# Altium PCB OnePieceBoard.PcbDoc (part 1 of 2)
Units mil, origin at the board's own origin, x right, y up, seen from the top; angles counter-clockwise.
Board outline 5749.09 x 7970 mil, 2 copper layers (Top Layer, Bottom Layer); 128 components, 61 nets, 384 pads, 43 vias.
Unrouted connection lines stored in the file: 1.
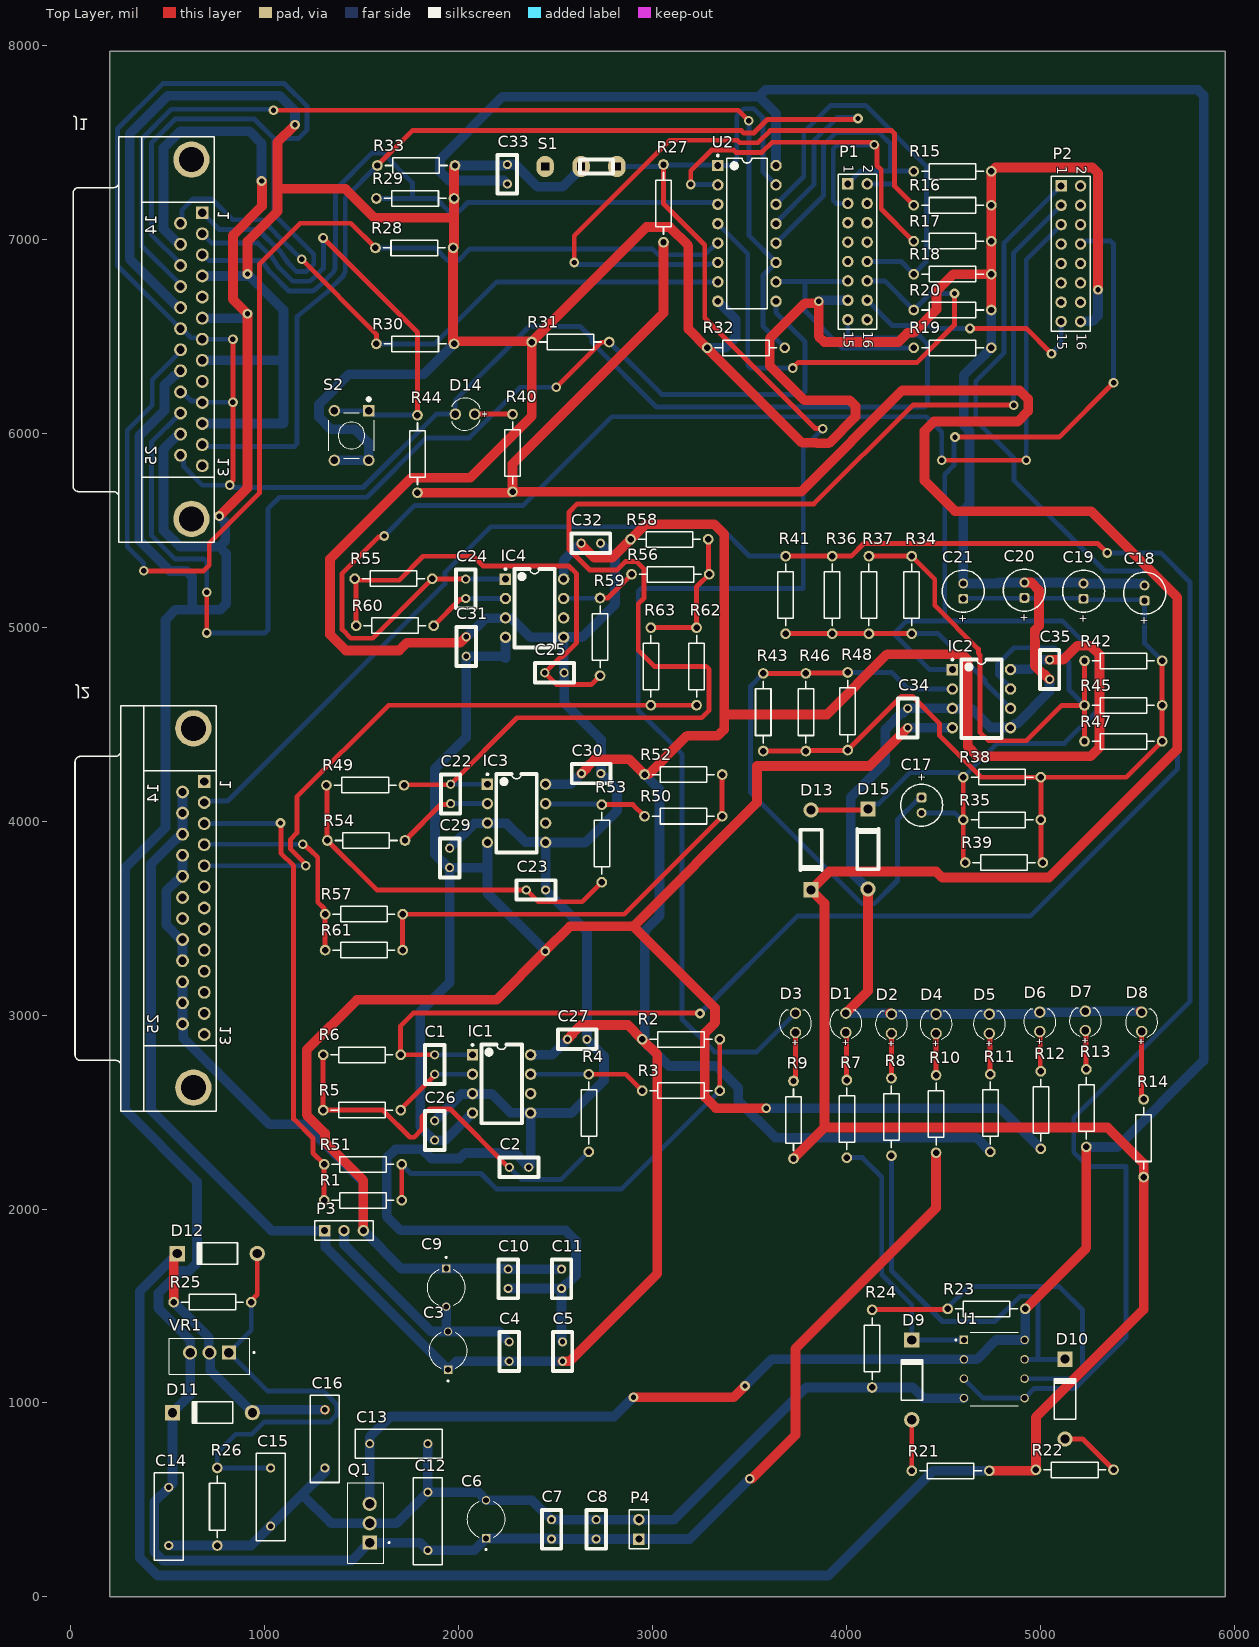
[diagram p0: Top Layer view]
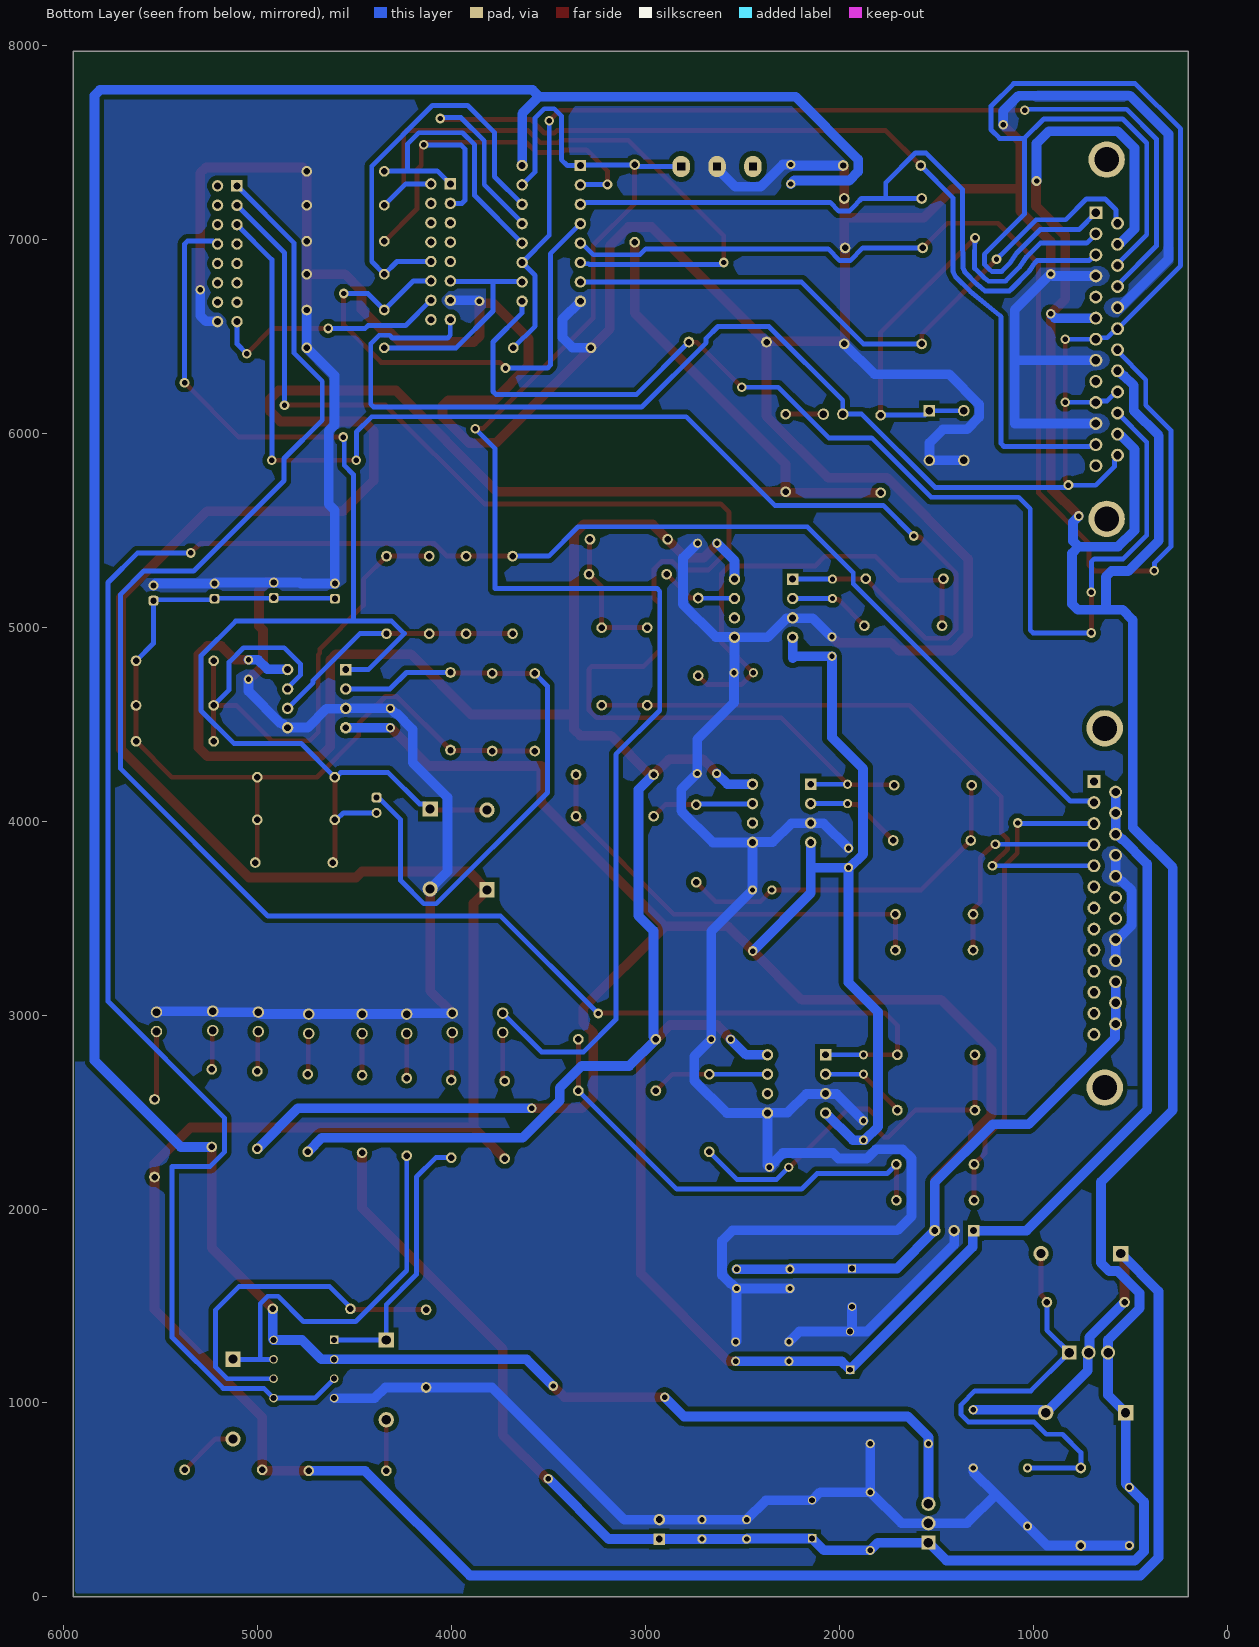
[diagram p1: Bottom Layer view, seen from below]

## Layer stack, top to bottom
Top Solder: solder mask 0.4, Solder Resist, Dk 3.5
Top Layer: signal copper 1.4
Dielectric 1: dielectric 12.6, FR-4, Dk 4.8
Bottom Layer: signal copper 1.4
Bottom Solder: solder mask 0.4, Solder Resist, Dk 3.5

## Board outline
200.91,0 5950,0 5950,7970 200.91,7970

## Design rules (kind name [scope] priority, off if disabled: settings)
AcuteAngle [All] p1: minimum=6.00000000000000E+0001 checktracksonly=FALSE
Clearance [All] p1: gap=25 ignorepadtopadclearanceinfootprint=FALSE
PolygonConnect [All] p1: connectstyle=Direct reliefconductorwidth=10 reliefentries=4 polygonreliefangle="90 Angle" airgapwidth=10
RoomDefinition vdc_signal_adaptation [InComponentClass('vdc_signal_adaptation')] p1: confinementstyle=ConfineIn formatcopy=TRUE lockcomponents=FALSE outline 3459.06,3466.26 5779.06,3466.26 5779.06,5621.26 3459.06,5621.26
RoomDefinition Supplies [InComponentClass('Supplies')] p2: confinementstyle=ConfineIn formatcopy=TRUE lockcomponents=FALSE outline 384.09,110 3085,110 3085,1970 384.09,1970
RoomDefinition Comparator [InComponentClass('Comparator')] p3: confinementstyle=ConfineIn formatcopy=TRUE lockcomponents=FALSE outline 3625,531 5551.87,531 5551.87,1635 3625,1635
RoomDefinition current_signal_adaptation [InComponentClass('current_signal_adaptation')] p4: confinementstyle=ConfineIn formatcopy=TRUE lockcomponents=FALSE outline 1225,1980 3385,1980 3385,3145 1225,3145
RoomDefinition current_signal_adaptation_2 [InComponentClass('current_signal_adaptation_2')] p5: confinementstyle=ConfineIn formatcopy=TRUE lockcomponents=FALSE outline 1205,3260 3395,3260 3395,4435 1205,4435
RoomDefinition connectors_headers_LEDs [InComponentClass('connectors_headers_LEDs')] p6: confinementstyle=ConfineIn formatcopy=TRUE lockcomponents=FALSE outline 3550,2075 5665,2075 5665,3200 3550,3200
RoomDefinition current_signal_adaptation_3 [InComponentClass('current_signal_adaptation_3')] p7: confinementstyle=ConfineIn formatcopy=TRUE lockcomponents=FALSE outline 1285,4540 3435,4540 3435,5620 1285,5620
RoomDefinition Header [InComponentClass('Header')] p8: confinementstyle=ConfineIn formatcopy=TRUE lockcomponents=FALSE outline 5475,7400 3810,7400 3810,6320 5475,6320
RoomDefinition pwm_buffers_fault_sig [InComponentClass('pwm_buffers_fault_sig')] p9: confinementstyle=ConfineIn formatcopy=TRUE lockcomponents=FALSE outline 1271.42,5627.95 2425,5627.95 2425,6340 1271.42,6340
RoomDefinition "PWM Drivers" [InComponentClass('PWM Drivers')] p10: confinementstyle=ConfineIn formatcopy=TRUE lockcomponents=FALSE outline 1499.77,6350 3809.77,6350 3809.77,7565 1499.77,7565
RoomDefinition "Connector 1" [InComponentClass('Connector 1')] p11: confinementstyle=ConfineIn formatcopy=TRUE lockcomponents=FALSE outline 0,5380 835,5380 835,7595 0,7595
RoomDefinition "Connector 2" [InComponentClass('Connector 2')] p12: confinementstyle=ConfineIn formatcopy=TRUE lockcomponents=FALSE outline 0,2485 835,2485 835,4700 0,4700
RoutingVias [All] p1: holewidth=28 width=50 viastyle="Through Hole" minholewidth=28 minwidth=50 maxholewidth=28 maxwidth=50
SolderMaskExpansion [All] p1: expansion=4 istentingtop=FALSE
SupplyNets "Schematic Supply Nets_5" [InNet('VDD_15')] p1: voltage=0.000
SupplyNets "Schematic Supply Nets_4" [InNet('+5V')] p2: voltage=0.000
SupplyNets "Schematic Supply Nets_3" [InNet('GND')] p3: voltage=0.000
SupplyNets "Schematic Supply Nets_2" [InNet('3V3')] p4: voltage=0.000
SupplyNets "Schematic Supply Nets_1" [InNet('VEE_-15')] p5: voltage=0.000
SupplyNets "Schematic Supply Nets" [InNet('VIN_12')] p6: voltage=0.000
Width GND [InNet('GND')] p1: maxlimit=50 minlimit=50 preferedwidth=50 minimp=50.000000 maximp=50.000000 favimp=50.000000
Width GND_CTL [InNet('GND_CTL')] p2: maxlimit=50 minlimit=50 preferedwidth=50 minimp=50.000000 maximp=50.000000 favimp=50.000000
Width GND_SENS [InNet('GND_SENS')] p3: maxlimit=50 minlimit=50 preferedwidth=50 minimp=50.000000 maximp=50.000000 favimp=50.000000
Width Power-3V3 [InNet('3V3')] p4: maxlimit=50 minlimit=50 preferedwidth=50 minimp=50.000000 maximp=50.000000 favimp=50.000000
Width Power-5V [InNet('+5V')] p5: maxlimit=50 minlimit=50 preferedwidth=50 minimp=50.000000 maximp=50.000000 favimp=50.000000
Width Power-VIN [InNet('VIN_12')] p6: maxlimit=50 minlimit=50 preferedwidth=50 minimp=50.000000 maximp=50.000000 favimp=50.000000
Width Power-VEE [InNet('VEE_-15')] p7: maxlimit=50 minlimit=50 preferedwidth=50 minimp=50.000000 maximp=50.000000 favimp=50.000000
Width Power-VDD [InNet('VDD_15')] p8: maxlimit=50 minlimit=50 preferedwidth=50 minimp=50.000000 maximp=50.000000 favimp=50.000000
Width Signals [All] p9: maxlimit=25 minlimit=25 preferedwidth=25 minimp=50.000000 maximp=50.000000 favimp=50.000000
30 further rules are at their usual default settings.

## Classes and differential pairs
component class vdc_signal_adaptation: C17 C18 C19 C20 C21 C34 C35 D13 D15 IC2 R34 R35 R36 R37 R38 R39 R41 R42 R43 R45 R46 R47 R48
component class Supplies: C3 C4 C5 C6 C7 C8 C9 C10 C11 C12 C13 C14 C15 C16 D11 D12 P3 P4 Q1 R25 R26 VR1
component class "PWM Drivers": C33 R27 R28 R29 R30 R31 R32 R33 S1 U2
component class pwm_buffers_fault_sig: D14 R40 R44 S2
component class Header: P1 P2 R15 R16 R17 R18 R19 R20
component class current_signal_adaptation: C1 C2 C26 C27 IC1 R1 R2 R3 R4 R5 R6 R51
component class current_signal_adaptation_3: C24 C25 C31 C32 IC4 R55 R56 R58 R59 R60 R62 R63
component class current_signal_adaptation_2: C22 C23 C29 C30 IC3 R49 R50 R52 R53 R54 R57 R61
component class connectors_headers_LEDs: D1 D2 D3 D4 D5 D6 D7 D8 R7 R8 R9 R10 R11 R12 R13 R14
component class "Connector 2": J2
component class "Connector 1": J1
component class Comparator: D9 D10 R21 R22 R23 R24 U1

## Components (designator, comment, footprint, x,y, rotation, side; value= is the part's Value field where it differs from the comment)
C1 "Cap No Pol" RAD-0.1 1875,2745 r90 top value=10nF
C2 "Cap No Pol" RAD-0.1 2310,2215 r0 top value=47nF
C3 "ECA2AM100B" CAPPRD500W50D500H1100 1944.09,1270 r90 top
C4 "Cap No Pol" RAD-0.1 2259.09,1265 r90 top value=1uF
C5 "Cap No Pol" RAD-0.1 2534.09,1265 r90 top value=1uF
C6 "ECA2AM100B" CAPPRD500W50D500H1100 2140,400 r90 top
C7 "Cap No Pol" RAD-0.1 2477.52,348.42 r90 top value=1uF
C8 "Cap No Pol" RAD-0.1 2707.52,348.42 r90 top value=1uF
C9 "ECA2AM100B" CAPPRD500W50D500H1100 1934.09,1595 r270 top
C10 "Cap No Pol" RAD-0.1 2254.09,1640 r270 top value=1uF
C11 "Cap No Pol" RAD-0.1 2529.09,1640 r270 top value=1uF
C12 "Cap" RAD-0.3 1840,390 r90 top value=0.22uF
C13 "Cap" RAD-0.3 1690,790 r0 top value=0.1uF
C14 "Cap" RAD-0.3 504.09,415 r270 top value=0.1uF
C15 "Cap" RAD-0.3 1029.09,515 r270 top value=1uF
C16 "Cap" RAD-0.3 1309.09,815 r270 top value=1uF
C17 "860020772005" WCAP-ATG5_D5H11 -45614.68,54081.89 r90 top
C18 "860020772005" WCAP-ATG5_D5H11 55535.32,-44824.37 r270 top
C19 "860020772005" WCAP-ATG5_D5H11 55220.32,-44814.37 r270 top
C20 "860020772005" WCAP-ATG5_D5H11 54915.32,-44809.37 r270 top
C21 "860020772005" WCAP-ATG5_D5H11 54600.32,-44814.37 r270 top
C22 "Cap No Pol" RAD-0.1 1957.03,4140 r90 top value=10nF
C23 "Cap No Pol" RAD-0.1 2397.03,3645 r0 top value=47nF
C24 "Cap No Pol" RAD-0.1 2035,5197.5 r90 top value=10nF
C25 "Cap No Pol" RAD-0.1 2492.5,4765 r0 top value=47nF
C26 "Cap No Pol" RAD-0.1 1875,2405 r90 top value=1uF
C27 "Cap No Pol" RAD-0.1 2610,2875 r0 top value=1uF
C29 "Cap No Pol" RAD-0.1 1952.03,3810 r90 top value=1uF
C30 "Cap No Pol" RAD-0.1 2682.03,4245 r0 top value=1uF
C31 "Cap No Pol" RAD-0.1 2037.5,4900 r90 top value=1uF
C32 "Cap No Pol" RAD-0.1 2680,5432.5 r0 top value=1uF
C33 "Cap No Pol" RAD-0.1 2249.77,7335 r90 top value=1uF
C34 "Cap No Pol" RAD-0.1 4314.06,4531.26 r90 top value=1uF
C35 "Cap No Pol" RAD-0.1 5045.32,4781.26 r270 top value=1uF
D1 "Bright Green, 2.1V, 40°" WL-TMRC_D3.95H5.3 3995,2960 r90 top
D2 "Bright Green, 2.1V, 40°" WL-TMRC_D3.95H5.3 4230,2955 r90 top
D3 "Super Red, 2V, 40°" WL-TMRC_D3.95H5.3 3735,2960 r90 top
D4 "Super Red, 2V, 40°" WL-TMRC_D3.95H5.3 4460,2955 r90 top
D5 "Super Red, 2V, 40°" WL-TMRC_D3.95H5.3 4735,2955 r90 top
D6 "Super Red, 2V, 40°" WL-TMRC_D3.95H5.3 4995,2965 r90 top
D7 "Super Red, 2V, 40°" WL-TMRC_D3.95H5.3 5230,2970 r90 top
D8 "Super Red, 2V, 40°" WL-TMRC_D3.95H5.3 5520,2965 r90 top
D9 "Diode 1N4001" DO-41 4335,1119.09 r90 top
D10 "Diode 1N4001" DO-41 5125,1020 r90 top
D11 "Diode 1N4001" DO-41 729.09,950 r180 top
D12 "Diode 1N4001" DO-41 754.09,1770 r180 top
D13 "Diode BAT54" DO-204AL 3815.32,3851.26 r270 top
D14 "Super Red, 2V, 40°" WL-TMRC_D3.95H5.3 2031.42,6097.95 r180 top
D15 "Diode BAT54" DO-204AL 4109.06,3856.26 r90 top
IC1 "OPAMP" DIP-8 2220,2645 r0 top
IC2 "OPAMP" DIP-8 4694.06,4631.26 r0 top
IC3 "OPAMP" DIP-8 2297.03,4040 r0 top
IC4 "OPAMP" DIP-8 2390,5097.5 r0 top
J1 "D Connector 25" DSUB1.385-2H25A 246.89,6484.35 r270 top
J2 "D Connector 25" DSUB1.385-2H25A 256.89,3552.15 r270 top
P1 "Header 8X2" HDR2X8 4005,7285 r270 top
P2 "Header 8X2" HDR2X8 5105,7275 r270 top
P3 "Header 3" HDR1X3 1307.52,1888.43 r0 top
P4 "Header 2" HDR1X2 2927.52,298.42 r90 top
Q1 "LM7805CT/NOPB" TO254P1054X470X1955-3#1 1540,380 r90 top
R1 "Res1" AXIAL-0.4 1505,2045 r0 top value=100k
R2 "Res1" AXIAL-0.4 3145,2875 r0 top value=100k
R3 "Res1" AXIAL-0.4 3145,2610 r180 top value=10k
R4 "Res1" AXIAL-0.4 2670,2495 r270 top value=10k
R5 "Res1" AXIAL-0.4 1500,2510 r0 top value=6.2k
R6 "Res1" AXIAL-0.4 1500,2795 r0 top value=10k
R7 "Res1" AXIAL-0.4 4000,2465 r270 top value=10k
R8 "Res1" AXIAL-0.4 4230,2475 r270 top value=10k
R9 "Res1" AXIAL-0.4 3725,2460 r270 top value=10k
R10 "Res1" AXIAL-0.4 4460,2490 r270 top value=10k
R11 "Res1" AXIAL-0.4 4740,2495 r270 top value=10k
R12 "Res1" AXIAL-0.4 5000,2510 r270 top value=10k
R13 "Res1" AXIAL-0.4 5235,2520 r270 top value=10k
R14 "Res1" AXIAL-0.4 5530,2365 r270 top value=10k
R15 "Res1" AXIAL-0.4 4545,7350 r180 top value=1k
R16 "Res1" AXIAL-0.4 4545,7175 r180 top value=1k
R17 "Res1" AXIAL-0.4 4545,6990 r180 top value=1k
R18 "Res1" AXIAL-0.4 4545,6820 r180 top value=1k
R19 "Res1" AXIAL-0.4 4545,6440 r180 top value=1k
R20 "Res1" AXIAL-0.4 4545,6635 r180 top value=1k
R21 "Res1" AXIAL-0.4 4535,650 r0 top value=10k
R22 "Res1" AXIAL-0.4 5175,655 r180 top value=10k
R23 "Res1" AXIAL-0.4 4720,1485 r0 top value=10k
R24 "Res1" AXIAL-0.4 4130,1280 r90 top value=510
R25 "Res1" AXIAL-0.4 729.09,1520 r180 top value=390
R26 "Res1" AXIAL-0.4 754.09,465 r90 top value=620
R27 "Res1" AXIAL-0.4 3054.77,7185 r270 top value=10k
R28 "Res1" AXIAL-0.4 1769.77,6955 r180 top value=1k
R29 "Res1" AXIAL-0.4 1774.77,7210 r180 top value=1k
R30 "Res1" AXIAL-0.4 1774.77,6460 r180 top value=1k
R31 "Res1" AXIAL-0.4 2574.77,6470 r0 top value=1k
R32 "Res1" AXIAL-0.4 3479.77,6440 r0 top value=1k
R33 "Res1" AXIAL-0.4 1779.77,7380 r180 top value=1k
R34 "Res1" AXIAL-0.4 4334.06,5166.26 r90 top value=20k
R35 "Res1" AXIAL-0.4 4800.32,4006.26 r180 top value=12k
R36 "" AXIAL-0.4 3924.06,5166.26 r270 top value=100k
R37 "Res1" AXIAL-0.4 4114.06,5166.26 r90 top value=20k
R38 "Res1" AXIAL-0.4 4800.32,4226.26 r180 top value=13k
R39 "Res1" AXIAL-0.4 4810.32,3786.26 r180 top value=13k
R40 "Res1" AXIAL-0.4 2276.42,5897.95 r270 top value=10k
R41 "Res1" AXIAL-0.4 3684.06,5166.26 r270 top value=100k
R42 "Res1" AXIAL-0.4 5425.32,4826.26 r0 top value=12k
R43 "Res1" AXIAL-0.4 3569.06,4561.26 r90 top value=7.15k
R44 "Res1" AXIAL-0.4 1786.42,5892.95 r270 top value=10k
R45 "Res1" AXIAL-0.4 5425.32,4596.26 r0 top value=13k
R46 "Res1" AXIAL-0.4 3789.06,4561.26 r90 top value=7.15k
R47 "Res1" AXIAL-0.4 5425.32,4411.26 r0 top value=13k
R48 "Res1" AXIAL-0.4 4004.06,4566.26 r90 top value=7.15k
R49 "Res1" AXIAL-0.4 1517.03,4185 r0 top value=10k
R50 "Res1" AXIAL-0.4 3157.03,4025 r180 top value=10k
R51 "Res1" AXIAL-0.4 1505,2230 r0 top value=100k
R52 "Res1" AXIAL-0.4 3157.03,4240 r0 top value=100k
R53 "Res1" AXIAL-0.4 2737.03,3885 r270 top value=10k
R54 "Res1" AXIAL-0.4 1522.03,3900 r0 top value=6.2k
R55 "Res1" AXIAL-0.4 1662.5,5250 r0 top value=10k
R56 "Res1" AXIAL-0.4 3090,5272.5 r180 top value=10k
R57 "Res1" AXIAL-0.4 1510,3520 r0 top value=100k
R58 "Res1" AXIAL-0.4 3085,5452.5 r0 top value=100k
R59 "Res1" AXIAL-0.4 2727.5,4950 r270 top value=10k
R60 "Res1" AXIAL-0.4 1670,5007.5 r0 top value=6.2k
R61 "Res1" AXIAL-0.4 1510,3335 r0 top value=100k
R62 "Res1" AXIAL-0.4 3225,4797.5 r90 top value=100k
R63 "Res1" AXIAL-0.4 2990,4797.5 r90 top value=100k
S1 "SW-SPDT" MHDR1X3 2759.77,7375 r180 top
S2 "FSM8JH" SW_FSM8JH 1446.42,5987.95 r270 top
U1 "LM393N" DIP794W45P254L959H508Q8 4760,1175 r0 top
U2 "CD74HC367E" N0016A 3484.77,7030 r0 top
VR1 "LM317T/NOPB" TO254P1054X470X1955-3#2 714.09,1260 r180 top

## Footprints (in the part's own frame and the unit in brackets; to place one, negate y for a bottom-side part, rotate by r counter-clockwise, add the part's x,y. Pads: shape width x height; smd on the part's side, far side on the other; paste and mask are expansions set on the pad)
AXIAL-0.4 [mm] "Axial Device, Thru-Hole; 2 Leads; 0.4 in Pin Spacing"
  round 1.4 hole 0.85: 1(-5.08,0) 2(5.08,0)
  silkscreen extent -4.06,-1.02 4.06,1.02
CAPPRD500W50D500H1100 [mm]
  round 1.1 hole 0.75: N(2.5,0)
  rect 1.1x1.1 hole 0.75: P(-2.5,0)
  silkscreen extent -4.06,-2.5 2.32,2.5, body extent -2.75,-2.5 2.75,2.5, height 11
DIP794W45P254L959H508Q8 [mm]
  rect 1.13x1.13 hole 0.78: 1(-3.97,3.81)
  round 1.13 hole 0.78: 2(-3.97,1.27) 3(-3.97,-1.27) 4(-3.97,-3.81) 5(3.97,-3.81) 6(3.97,-1.27) 7(3.97,1.27) 8(3.97,3.81)
  silkscreen extent -5.13,-4.8 3.17,4.8
DIP-8 [mm]
  rect 1.5x1.5 hole 0.9: 1(-3.81,3.81)
  round 1.5 hole 0.9: 2(-3.81,1.27) 3(-3.81,-1.27) 4(-3.81,-3.81) 5(3.81,-3.81) 6(3.81,-1.27) 7(3.81,1.27) 8(3.81,3.81)
  silkscreen extent -3.93,-5.15 2.65,5.23, body extent -3.6,-5.15 3.6,5.15, height 5.08
DO-41 [mm] "Diode, Axial; Body 5.2 x 2.7 mm (LxDia. max), Lead Dia. 0.86 mm (max)"
  round 2 hole 1.2: 1(-5.23,0)
  rect 2x2 hole 1.2: 2(5.23,0)
  silkscreen extent -2.65,-1.42 2.75,1.4
DO-204AL [mm]
  round 2 hole 1.2: 1(-5.23,0)
  rect 2x2 hole 1.2: 2(5.23,0)
  silkscreen extent -2.65,-1.4 2.75,1.4
DSUB1.385-2H25A [mm] "Connector; D Subminiature; 25 Position; Right Angle; Pitch 1.385 mm"
  rect 1.69x1.69 hole 1.09: 1(-16.566,10.92)
  round 1.69 hole 1.09: 2(-13.805,10.92) 3(-11.044,10.92) 4(-8.283,10.92) 5(-5.522,10.92) 6(-2.761,10.92) 7(0,10.92) 8(2.761,10.92) 9(5.522,10.92) 10(8.283,10.92) 11(11.044,10.92) 12(13.805,10.92) 13(16.566,10.92) 14(-15.185,8.08) 15(-12.425,8.08) 16(-9.663,8.08) 17(-6.903,8.08) 18(-4.142,8.08) 19(-1.38,8.08) 20(1.38,8.08) 21(4.142,8.08) 22(6.903,8.08) 23(9.663,8.08) 24(12.425,8.08) 25(15.185,8.08)
  round 4.76 hole 3.26: 26(-23.526,9.5) 27(23.526,9.5)
  silkscreen extent -26.5,-6 26.6,12.5
HDR1X2 [mm] "Connector; Header; 2 Position"
  rect 1.5x1.5 hole 0.9: 1(0,0)
  round 1.5 hole 0.9: 2(2.54,0)
  silkscreen extent -1.27,-1.27 3.81,1.27
HDR1X3 [mm] "Connector; Header; 3 Position"
  rect 1.5x1.5 hole 0.9: 1(0,0)
  round 1.5 hole 0.9: 2(2.54,0) 3(5.08,0)
  silkscreen extent -1.27,-1.27 6.35,1.27
HDR2X8 [mm] "Connector; Header; 8x2 Position"
  rect 1.5x1.5 hole 0.9: 1(0,0)
  round 1.5 hole 0.9: 2(0,2.54) 3(2.54,0) 4(2.54,2.54) 5(5.08,0) 6(5.08,2.54) 7(7.62,0) 8(7.62,2.54) 9(10.16,0) 10(10.16,2.54) 11(12.7,0) 12(12.7,2.54) 13(15.24,0) 14(15.24,2.54) 15(17.78,0) 16(17.78,2.54)
  silkscreen extent -1.27,-1.27 19.05,3.81
MHDR1X3 [mil]
  oval 90x110 hole 40 square: 1(-55,0) 2(130,0) 3(315,0)
  silkscreen extent -35,-35 135,35
N0016A [mm] "DIP, 16-Leads, Body 19.7x6.6mm, Pitch 2.54mm"
  rect 1.5x1.5 hole 0.9: 1(-3.81,8.89)
  round 1.5 hole 0.9: 2(-3.81,6.35) 3(-3.81,3.81) 4(-3.81,1.27) 5(-3.81,-1.27) 6(-3.81,-3.81) 7(-3.81,-6.35) 8(-3.81,-8.89) 9(3.81,-8.89) 10(3.81,-6.35) 11(3.81,-3.81) 12(3.81,-1.27) 13(3.81,1.27) 14(3.81,3.81) 15(3.81,6.35) 16(3.81,8.89)
  silkscreen extent -3.93,-9.85 2.65,10.31, body extent -3.95,-9.85 3.95,9.85, height 5.08
RAD-0.1 [mm]
  round 1.2 hole 0.7: 1(-1.27,0) 2(1.27,0)
  silkscreen extent -2.54,-1.27 2.54,1.27
RAD-0.3 [mm] "Radial Cap, Thru-Hole; 2 Leads; 0.3 in Pin Spacing"
  round 1.2 hole 0.7: 1(-3.81,0) 2(3.81,0)
  silkscreen extent -5.71,-1.91 5.71,1.9
SW_FSM8JH [mm]
  rect 1.498x1.498 / inner round 1.498 / far side rect 1.498x1.498 hole 0.99: 1(-3.25,2.25)
  round 1.498 hole 0.99: 2(-3.25,-2.25) 3(3.25,2.25) 4(3.25,-2.25)
  silkscreen extent -4.95,-3 3,3, body extent -3,-3.95 3,3.95, height 9.5
TO254P1054X470X1955-3#1 [mm]
  rect 1.86x1.86 hole 1.24: 1(-2.54,0)
  round 1.86 hole 1.24: 2(0,0) 3(2.54,0)
  silkscreen extent -5.27,-2.64 5.27,2.86
TO254P1054X470X1955-3#2 [mm]
  rect 1.86x1.86 / inner round 1.86 / far side rect 1.86x1.86 hole 1.24: 1(-2.54,0)
  round 1.86 hole 1.24: 2(0,0) 3(2.54,0)
  silkscreen extent -5.94,-1.84 5.27,2.86, body extent -5.08,-1.49 5.08,2.71, height 22.86
WCAP-ATG5_D5H11 [mm] "Aluminum Electrolytic Capacitors, 5x11mm"
  rrect50% 1.3x1.3 hole 0.8: 1(-1269,-1270)
  round 1.3 hole 0.8: 2(-1271,-1270)
  silkscreen extent -1272.75,-1272.75 -1267.25,-1267.25, body extent -1272.49,-1272.5 -1267.5,-1267.5, height 11.31
WL-TMRC_D3.95H5.3 [mm] "THT Mono-color Round Color LED, 2-leads"
  round 1.5 hole 1: 1(-1.27,0) 2(1.27,0)
  silkscreen extent -2,-2.1 1.69,2.1, body extent -1.99,-1.97 1.63,1.97, height 5.35

## Part data
C1 C2 C4 C5 C7 C8 C10 C11 C22 C23 C24 C25 C26 C27 C29 C30 C31 C32 C33 C34 C35: "Polarized Capacitor (Radial)", LatestRevisionDate=17-Jul-2002, LatestRevisionNote="Re-released for DXP Platform.", PackageDescription="Polarized Capacitor (Radial); 2 Leads", PackageReference=RB7.6-15, Published=8-Jun-2000, Publisher="Altium Limited"
C3 C6 C9: "10ÂµF 100V Aluminum Electrolytic Capacitors Radial, Can 2000 Hrs @ 85Â°C", Package="RADIAL-2 Panasonic", Check_prices=https://www.snapeda.com/parts/ECA2AM100B/Panasonic/view-part/?ref=eda, Digi-Key_Part_Number=P19556TB-ND, MF=Panasonic, MP=ECA2AM100B, SnapEDA_Link=https://www.snapeda.com/parts/ECA2AM100B/Panasonic/view-part/?ref=snap
C12 C13 C14 C15 C16: "Capacitor", LatestRevisionDate=17-Jul-2002, LatestRevisionNote="Re-released for DXP Platform.", PackageDescription="Radial Cap, Thru-Hole; 2 Leads; 0.3 in Pin Spacing", PackageReference=RAD-0.3, Published=8-Jun-2000, Publisher="Altium Limited"
C17 C18 C19 C20 C21: library part CMP-03913-53914248-1, "860020772005 Cap Aluminum Lytic 1uF 63V 20% (5 X 11mm) Radial 2mm 13mA 2000h 105C", Capacitance=1µF, Case/Package=Radial, Leakage Current=3µA, Max Operating Temperature=105°C, Min Operating Temperature=-40°C, Ripple Current=13mA, Tolerance=20%, Voltage Rating=63V, Diameter=5mm, Height=11mm, Height - Seated (Max)=12.4968mm, Lead Pitch=2.0066mm, Length=11mm, Life (Hours)=2000hours, Material=Aluminium, Mount="Through Hole", NexarPartId=53914248, Packaging="Tape & Box (TB)", Pitch=2mm, Polarity=Polar, REACH SVHC=Unknown, RoHS=Compliant, Voltage Rating (DC)=63V
D1 D2: library part 151031VS04000, "WL-TMRC Mono-color Round Color, THT, D3.95 x H5.3mm, Bright Green, 2.1V, 40°", Case/Size Code=3mm, Emitting Color="Bright Green", Forward Voltage=2.1V, Manufacturer="Wurth Elektronik", Operating Temperature Max=85°C, Operating Temperature Min=-40°C, Category="Signal LEDs", Chip Technology=AlInGaP, ComponentLink1Description="Website Link", ComponentLink1URL=https://www.we-online.com/redexpert/article/151031VS04000?ad, ComponentLink2Description="Datasheet Link", ComponentLink2URL=https://www.we-online.com/redexpert/spec/151031VS04000?ad, Diameter=3.95mm, Dominant Wavelength=570nm, Height=5.3mm, Luminous Intensity=120mcd, Manufacturer Part Number=151031VS04000, Match Code=WL-TMRC, Mount="Through Hole", Packaging=Bulk, Peak Wavelength=573nm, Viewing Angle=40°
D3 D4 D5 D6 D7 D8 D14: library part 151031SS04000, "WL-TMRC Mono-color Round Color, THT, D3.95 x H5.3mm, Super Red, 2V, 40°", Case/Size Code=3mm, Emitting Color="Super Red", Forward Voltage=2V, Manufacturer="Wurth Elektronik", Operating Temperature Max=85°C, Operating Temperature Min=-40°C, Category="Signal LEDs", Chip Technology=AlInGaP, ComponentLink1Description="Website Link", ComponentLink1URL=https://www.we-online.com/redexpert/article/151031SS04000?ad, ComponentLink2Description="Datasheet Link", ComponentLink2URL=https://www.we-online.com/redexpert/spec/151031SS04000?ad, Diameter=3.95mm, Dominant Wavelength=635nm, Height=5.3mm, Luminous Intensity=160mcd, Manufacturer Part Number=151031SS04000, Match Code=WL-TMRC, Mount="Through Hole", Packaging=Bulk, Peak Wavelength=640nm, Viewing Angle=40°
D9 D10 D11 D12: "1 Amp General Purpose Rectifier", Code_JEDEC=DO-204-AL, ComponentLink1Description="Manufacturer Link", ComponentLink1URL=http://www.fairchildsemi.com/, ComponentLink2Description=Datasheet, ComponentLink2URL=http://www.fairchildsemi.com/ds/1N%2F1N4001.pdf, DatasheetVersion=1998, LatestRevisionDate=17-Jul-2002, LatestRevisionNote="Re-released for DXP Platform.", PackageDescription="Diode, Axial; Body 5.2 x 2.7 mm (LxDia. max), Lead Dia. 0.86 mm (max)", PackageReference=DO-41, PackageVersion=Aug-1999, Published=8-Jun-2000, Publisher="Altium Limited"
D13 D15: library part "Diode 11DQ03", "Schottky Rectifier", Code_JEDEC=DO-204-AL, ComponentLink1Description="Manufacturer Link", ComponentLink1URL=http://www.irf.com/, ComponentLink2Description=Datasheet, ComponentLink2URL=http://www.irf.com/product-info/datasheets/data/11dq03.pdf, DatasheetVersion=Dec-1997, LatestRevisionDate=17-Jul-2002, LatestRevisionNote="Re-released for DXP Platform.", PackageDescription="Diode, Axial; Body 5.2 x 2.7 mm (LxDia. max), Lead Dia. 0.86 mm (max)", PackageReference=DO-204AL, Published=8-Jun-2000, Publisher="Altium Limited"
IC1 IC2 IC3 IC4: library part ADTL082, "ADTL082"
J1 J2: "Receptacle Assembly, 25 Position, Right Angle", PackageDocument=U, DatasheetDocument=19-Mar-1999, Gender=Receptacle, LatestRevisionDate=17-Jul-2002, LatestRevisionNote="Re-released for DXP Platform.", Orientation="Right Angle", PackageReference=787202, Positions=25, Published=15-Jun-2001, Publisher="Altium Limited"
P1 P2: "Header, 8-Pin, Dual row", LatestRevisionDate=17-Jul-2002, LatestRevisionNote="Re-released for DXP Platform.", Publisher="Altium Limited"
P3: "Header, 3-Pin", LatestRevisionDate=17-Jul-2002, LatestRevisionNote="Re-released for DXP Platform.", Publisher="Altium Limited"
P4: "Header, 2-Pin", LatestRevisionDate=17-Jul-2002, LatestRevisionNote="Re-released for DXP Platform.", Publisher="Altium Limited"
Q1: Package=None, Availability=Unavailable, MP=LM7805CT/NOPB, Price=None
R1 R2 R3 R4 R5 R6 R7 R8 R9 R10 R11 R12 R13 R14 R15 R16 R17 R18 R19 R20 R21 R22 R23 R24 R25 R26 R27 R28 R29 R30 R31 R32 R33 R34 R35 R37 R38 R39 R40 R41 R42 R43 R44 R45 R46 R47 R48 R49 R50 R51 R52 R53 R54 R55 R56 R57 R58 R59 R60 R61 R62 R63: "Resistor", LatestRevisionDate=17-Jul-2002, LatestRevisionNote="Re-released for DXP Platform.", PackageDescription="Axial Device, Thru-Hole; 2 Leads; 0.3 in Pin Spacing", PackageReference=AXIAL-0.3, Published=8-Jun-2000, Publisher="Altium Limited"
R36: library part Res1, "Resistor", LatestRevisionDate=17-Jul-2002, LatestRevisionNote="Re-released for DXP Platform.", PackageDescription="Axial Device, Thru-Hole; 2 Leads; 0.3 in Pin Spacing", PackageReference=AXIAL-0.3, Published=8-Jun-2000, Publisher="Altium Limited"
S1: "SPDT Subminiature Toggle Switch, Right Angle Mounting, Vertical Actuation", ComponentLink1Description="Manufacturer Link", ComponentLink1URL=http://www.apem.com, DatasheetVersion=05-Dec-2000, LatestRevisionDate=17-Dec-2003, LatestRevisionNote="Schematic revised, PCB Footprint replaced.", PackageDescription="Switch; 4 Leads", PackageReference=TL36WW15050, Published=24-Mar-1999, Publisher="Altium Limited"
S2: "Tactile Switch SPST-NO Top Actuated Through Hole", Package=None, Availability="In Stock", Check_prices=https://www.snapeda.com/parts/FSM8JH/TE+Connectivity+ALCOSWITCH+Switches/view-part/?ref=eda, MF="TE Connectivity", MP=FSM8JH, Price=None, SnapEDA_Link=https://www.snapeda.com/parts/FSM8JH/TE+Connectivity+ALCOSWITCH+Switches/view-part/?ref=snap
U1: "Low Power Low Offset Voltage Dual Comparator 8-PDIP 0 to 70", Package="PDIP-8 Texas Instruments", BuyPart=https://www.snapeda.com/parts/LM393N/NOPB/Texas%20Instruments/view-part/67776/?ref=eda, Digi-Key_Part_Number=LM393NNS/NOPB-ND, DigiKey-Purchase-URL=https://snapeda.com/shop?store=DigiKey&id=67776, MF="Texas Instruments", Mouser-Purchase-URL=https://snapeda.com/shop?store=Mouser&id=67776, MP=LM393N/NOPB, SnapEDA_Link=https://www.snapeda.com/parts/LM393N/NOPB/Texas%20Instruments/view-part/67776/?ref=snap, Texas_Instruments-Purchase-URL=https://snapeda.com/shop?store=Texas+Instruments&id=67776
U2: library part CMP-0440-00947-3, "High Speed CMOS Logic Hex Buffers/Line Drivers with Non-Inverting 3-State Outputs, N0016A, TUBE", F @ Nom Voltage(Max)(Mhz)=28, Generic Part Number=CD74HC367, ICC @ Nom Voltage(Max)(mA)=0.08, Manufacturer="Texas Instruments", Operating Temperature Range(C)="-55 to 125", Rating=Catalog, tpd @ Nom Voltage(Max)(ns)=24, Voltage(Nom)(V)=6, Bits(#)=6, Code_JEDEC=MS-001, DatasheetVersion=SCHS181D, Input Type=CMOS, Output Type=CMOS, PackageReference=N0016A, PackageVersion=http://www.ti.com/lit/ml/mpdi002c/mpdi002c.pdf, VCC(Max)(V)=6, VCC(Min)(V)=2
VR1: "1.5-A, 40-V, adjustable linear voltage regulator", Package="TO-220-3 Texas Instruments", Check_prices=https://www.snapeda.com/parts/LM317T/NOPB/Texas+Instruments/view-part/?ref=eda, MF="Texas Instruments", MP=LM317T/NOPB, SnapEDA_Link=https://www.snapeda.com/parts/LM317T/NOPB/Texas+Instruments/view-part/?ref=snap

## Via types
v1: diameter 50, hole 28, Top Layer to Bottom Layer, 43 vias

## Nets (pads, with @x,y where several pads share a name; then routed paths per layer and width w, separated by ;. In a path a pad name is that pad's centre, name@x,y a point inside that pad or via, vN(x,y) a via of type N, cw(c..) or ccw(c..) an arc to the next point about the centre after c; other vN are vias at no path point)
3V3: C16.1 D11.1 D12.2 D13.2 R9.2 R14.2 R21.2 R22.2 R25.2 R27.2 R40.2 R44.2 VR1.2 | length 23363.9
  Top Layer w50: R25.2 529.09,1750.91 D12.2 ; R44.2 2270.03,5692.95 2275.03,5697.95 R40.2 ; R27.2 3054.77,6619.77 2276.42,5841.42 R40.2 ; R9.2 3885,2420 ; R21.2 4968.61,650 4973.61,655 R22.2 4975,926.46 5530,1481.46 R14.2 5530,2235 5345,2420 3885,2420 ; R40.2 3763.66,5697.95 4285.36,6219.64 4891.13,6219.64 4935.06,6175.71 4935.06,6113.58 4881.48,6060 4448.93,6060 4400,6011.07 4400,5755 4557.38,5597.62 5259.6,5597.62 5702.88,5154.34 5702.88,4369.13 5042.45,3708.7 4491.58,3708.7 4460.56,3739.72 3909.69,3739.72 D13.2 3885,3575.67 3885,2420
  Bottom Layer w50: R25.2@528.11,1519.02 R25.2 709.65,1339.44 709.65,1264.44 718.54,1255.56 718.54,1166.46 D11.1 942.78,950 957.78,965 C16.1 ; D12.2 354.09,1575.91 354.09,202.87 446.96,110 3904.69,110 4444.69,650 R21.2 ; R40.2@2276.42,5696.57 R40.2
3V3_MCU: P1.14 P2.15 | length 1249.6
  Top Layer w25: v1(4635,6540) 4925,6540 v1(5055,6410)
  Bottom Layer w25: P1.14 4234.94,6555.06 4428.67,6555.06 4443.73,6540 v1(4635,6540) ; v1(5055,6410) 5105,6460 P2.15
5V_ind: D9.2 R7.2 U1.1 | length 1394.3
  Bottom Layer w25: R7.2 4080,2265 4180,2165 4180,1662.28 4335,1507.28 D9.2 U1.1
240mV_ind: D10.2 R8.2 U1.7 | length 2030.3
  Bottom Layer w25: R8.2 4230,1682.99 4493.05,1419.94 4762.93,1419.94 4893.05,1550.06 4946.95,1550.06 4985.06,1511.95 4985.06,1231.81 4991.87,1225 ; U1.7 4991.87,1225 ; D10.2@5120.91,1230 D10.2 5124.09,1225 4991.87,1225
+5V: C13.1 C33.1 Q1.3 R13.2 R23.2 U1.2 U1.8 U2.16 | length 15748.2
  Top Layer w50: v1(2900,1030) 3417.5,1030 v1(3475,1087.5) ; R23.2 5235,1800 R13.2
  Bottom Layer w50: Q1.3 C13.1 1540,823.51 1646.49,930 2800,930 v1(2900,1030) ; C33.1 2232.33,7302.44 1947.65,7302.44 1902.21,7347.87 1902.21,7412.13 2225.09,7735 3546.78,7735 ; v1(3475,1087.5) 3612.5,1225 U1.2 4670,1225 4770,1325 U1.8 4920,1328.7 R23.2 ; U2.16 3634.77,7647 3546.78,7735 ; R13.2@5234.02,2319.02 R13.2 5394.69,2320 5840,2765.31 5840,7740.71 5810.71,7770 3581.78,7770 3546.78,7735
DCLINK_A: J2.2 R36.1 R41.1 U1.3 U1.5 | length 11254.1
  Top Layer w25: R41.1 R36.1 4022.05,5366.26 4087.11,5431.32 5293.75,5431.32 v1(5342.53,5382.53)
  Bottom Layer w25: J2.2 694.76,4103.6 808.1,4103.6 1927.56,5223.05 1927.56,5281.01 2164.11,5517.56 3346.77,5517.56 3498.07,5366.26 R41.1 ; U1.3 4703.7,1025 U1.5 4966.3,1075 5176.58,1075 5440,1338.42 5440,2220 5242.99,2220 5169.94,2293.05 5169.94,2470.15 5770,3070.21 5770,5230 5617.47,5382.53 v1(5342.53,5382.53)
FAULT_T1: D14.2 J1.1 J1.7 J1.10 J1.16 J1.19 J1.22 J1.25 P1.15 | length 12162.4
  Top Layer w25: v1(818.24,5732.32) 818.24,5737.76 835,5754.52 835,6148.45 v1@840.77,6154.23 ; v1(835,6160) v1(835,6484.35)
  Bottom Layer w25: J1.25 565,5875.26 580,5860.26 580,5828.88 677.22,5731.66 817.57,5731.66 v1(818.24,5732.32) ; J1.22 572.28,6212.6 618.68,6166.2 668.86,6166.2 J1.10 677.69,6159.12 834.12,6159.12 v1(835,6160) ; J1.16 565,6873.42 414.71,7023.72 414.71,7495.98 538.37,7619.65 945.35,7619.65 1045,7520 ; J1.1 763.37,7050 964.29,7050 1082.95,6931.34 1120.29,6876.91 1126.6,6870.01 1155.89,6840.72 1163.21,6833.4 1212.86,6833.4 1224.2,6842.61 1251.6,6870.01 1251.6,6921.79 1244.28,6929.11 1045,7128.39 1045,7520 ; v1@818.9,5720 835,5720 925,5720 1505.47,5720 1883.43,6097.95 D14.2 1981.42,6168.65 2362.77,6550 2625,6550 2686.41,6488.59 2686.41,6466.35 3017.82,6134.94 4400.36,6134.94 4415,6149.59 4415,6462.01 4371.95,6505.06 4318.05,6505.06 4302.99,6490 4019.64,6490 4005,6504.64 P1.15 ; v1(835,6484.35) J1.7 668.86,6492.3 618.68,6492.3 572.28,6538.7 J1.19 239.71,6863.99 239.71,7568.47 473.74,7802.5 1100.89,7802.5 1217.5,7685.89 1217.5,7564.11 1173.39,7520 1045,7520
GND: C2.2 C3.N C4.2 C5.2 C6.N C7.2 C8.2 C9.N C10.2 C11.2 C12.2 C13.2 C14.2 C15.2 C16.2 C18.2 C19.2 C20.2 C21.2 C23.2 C25.2 C26.2 C27.2 C29.2 C30.2 C31.2 C32.2 C33.2 C34.2 C35.2 D1.2 D2.2 D4.2 D5.2 D6.2 D7.2 D8.2 D15.1 IC1.3 IC1.5 IC2.3 IC2.5 IC3.3 IC3.5 IC4.3 IC4.5 J1.4 J1.8 J1.11 J1.18 J2.17 J2.18 J2.21 J2.22 P1.13 P2.16 P3.2 P4.2 Q1.2 R15.1 R16.1 R17.1 R18.1 R19.1 R20.1 R24.1 R26.1 R28.1 R29.1 R30.1 R31.1 R32.1 R33.1 S1.2 S2.3 S2.4 U1.4 U2.8 | length 43198.2
  Top Layer w50: v1(910,6820.62) 910,6988.93 1065,7143.93 1065,7270 ; v1(1155,7590) 1065,7500 1065,7270 ; R33.1 1979.77,7378.61 1974.77,7373.61 R29.1 1974.77,7110 ; C31.2 2007.5,4920 1732.36,4920 1692.3,4879.94 1417.16,4879.94 1334.94,4962.16 1334.94,5351.16 1754.29,5770.51 2058.66,5770.51 2374.77,6086.62 R31.1 ; D1.2 4109.06,3124.06 D15.1 ; D2.2@4222.55,3010 4227.55,3005 D2.2 ; R20.1 R18.1 ; C20.2 4915.55,5229.77 4951.2,5229.77 4990.91,5190.07 4990.91,5005.43 4970.32,4984.83 4970.32,4800.19 5014.25,4756.26 5020.32,4756.26 C35.2 ; D6.2@4992.55,3015 D6.2 ; C19.2 C19.2@5220.55,5224.77 ; D7.2@5227.55,3020 D7.2 ; v1(5295,6740) 5295,7340.71 5265.71,7370 4766.39,7370 4746.39,7350 R15.1 R16.1 R17.1 R18.1 ; D8.2@5512.55,3020 5517.55,3015 D8.2 ; 1065,7270 1075,7260 1415.09,7260 1565.09,7110 1974.77,7110 ; 1974.77,7110 1974.77,6961.39 1969.77,6956.39 R28.1 1969.77,6466.39 1974.77,6461.39 R30.1 1976.16,6460 1990,6473.84 2369.55,6473.84 2373.39,6470 R31.1 ; R31.1 2967.33,7062.56 3086.9,7062.56 3182.85,6966.61 3182.85,6536.93 R32.1 3769.77,5950 3842.39,5950 3844.95,5947.44 3907.09,5947.44 4045,6085.36 4045,6140.16 4015.71,6169.45 3780.6,6169.45 3602.21,6347.84 3602.21,6487.21 3785,6670 3845,6670 v1(3855,6680) 3855,6499.29 3884.29,6470 4265.31,6470 4312.87,6517.56 4342.56,6517.56 4462.54,6637.54 4462.54,6733.61 4548.93,6820 R18.1
  Bottom Layer w50: C14.2 R26.1 929.09,265 C15.2 1192.05,527.95 ; J1.18 561.84,6650.57 549.43,6650.57 302.21,6897.79 302.21,7542.58 499.63,7740 1075,7740 1155,7660 v1(1155,7590) ; J2.22@570.53,3280.39 J2.22 J2.21 571.84,3392.26 562.78,3392.26 491.73,3463.31 491.73,3640.99 540.51,3689.76 545.09,3689.76 570.53,3715.2 J2.18 J2.17 ; J1.11 1094.55,6049.55 1095.37,6050.37 1095.37,6370 ; J1.8 1089.72,6375.65 1095.37,6370 ; J1.4 899.83,6810.45 v1(910,6820.62) 1095.37,6635.25 1095.37,6370 ; C16.2 1309.09,645 1192.05,527.95 ; S2.4 S2.3 1535,5950 1465,6020 1341.33,6020 1278.35,6082.98 1278.35,6148.83 1433.44,6303.92 1818.7,6303.92 R30.1 R30.1@1974.77,6458.61 ; P3.2 1407.52,1817.48 1856.58,1368.42 2205.67,1368.42 C4.2 ; C13.2 C12.2 ; C26.2 2013.27,2593.27 2068.27,2593.27 IC1.3 2071.73,2593.27 2169.28,2593.27 2265.82,2496.73 IC1.5@2368.27,2496.73 ; C3.N@1934.09,1378.42 C9.N ; C29.2 2080.3,3988.27 2145.29,3988.27 IC3.3 2148.76,3988.27 2246.31,3988.27 2342.84,3891.73 2445.29,3891.73 IC3.5 ; R28.1 R28.1@1969.77,6956.39 ; R29.1 R29.1@1974.77,7211.39 ; R33.1 2244.77,7380 C33.2 2290.42,7385 2405.42,7270 2534.77,7270 2616.71,7351.94 2616.71,7361.93 S1.2 ; C31.2 2040.05,4950 2135.82,5045.77 IC4.3@2238.27,5045.77 ; IC4.3 2241.73,5045.77 2271.73,5045.77 2370,4947.5 IC4.5 ; C10.2 C11.2 ; IC1.5@2370,2492.55 2370,2225 C2.2 2333.62,2241.38 2333.62,2245.49 2290.5,2288.62 2031.9,2288.62 2003.28,2260 1857.87,2260 1810.31,2307.56 1672.87,2307.56 1627.44,2262.13 1627.44,1962.56 1700,1890 2550,1890 2604.1,1835.9 2604.1,1658.93 2560.16,1615 2554.1,1615 C11.2 ; IC1.5 2579.68,2495 2747.56,2662.87 2747.56,2787.44 C27.2 2660,3432.03 C23.2 IC3.5 ; R31.1@2373.39,6470 R31.1 ; C5.2 2529.1,1320 C11.2 ; C32.2@2733.75,5428.75 2805.06,5357.44 2805.06,5117.87 2636.42,4949.23 2541.73,4949.23 IC4.5 ; R32.1 3280.75,6440.98 3375.75,6440.98 3426.86,6492.09 3426.86,6587.91 U2.8 ; v1(3855,6680) 3860,6685 P1.13 ; D1.2 4222.55,3010 4227.55,3005 D2.2 D4.2 D5.2 4982.55,3005 4992.55,3015 D6.2 5222.55,3015 5227.55,3020 D7.2 5512.55,3020 5517.55,3015 D8.2 ; D15.1 4019.69,3739.72 4019.69,4122.25 4198.78,4301.33 4198.78,4472.04 4282.99,4556.26 4289.06,4556.26 C34.2 IC2.3 4545.79,4579.53 4643.34,4579.53 4739.88,4482.99 4842.33,4482.99 IC2.5 4846.51,4481.26 4866.98,4501.73 4877,4501.73 5045.32,4670.05 C35.2 ; U1.4 4395.04,1025 4340.04,1080 R24.1 3790,1080 3108.42,398.42 P4.2 C8.2 C7.2 2377.52,498.42 C6.N 2098.42,540 C12.2 ; R20.1 R19.1 4602.5,6297.5 4602.5,6041.07 4632.5,6011.07 4632.5,5634.4 4600.32,5602.22 C21.2 4776.46,5225 4781.46,5230 C20.2 5215,5230 5220,5225 C19.2 5525,5225 5535,5215 C18.2 ; R15.1 R15.1@4746.39,7350 ; P2.16@5207.45,6575 P2.16 5206.73,6576.73 5265.71,6576.73 5295,6606.02 v1(5295,6740) ; 1192.05,527.95 1340,380 Q1.2 1680,380 C12.2 ; IC3.5 2651.71,3890 2814.59,4052.87 2814.59,4162.44 C30.2 2732.03,4421.07 2542.5,4610.59 C25.2 2540,4767.5 IC4.5
I1_S: C1.2 IC1.1 P2.1 R6.2 | length 8845.6
  Top Layer w25: C1.2 R6.2 1699.02,2795.98 1699.02,2944.02 1766.12,3011.12 3239.52,3011.12 v1(3242.82,3007.82)
  Bottom Layer w25: C1.2 IC1.1 ; v1(3242.82,3007.82) 3745,3510 4945,3510 5705,4270 5705,5169.36 5585.01,5289.35 5328.7,5289.35 4862.5,5755.55 4862.5,5869.45 4665,6066.95 4665,6267.99 4810.06,6413.05 4810.06,6980.06 P2.1
I2_S: C22.2 IC3.1 P2.3 R49.2 | length 7282
  Top Layer w25: R49.2 1719.53,4187.5 1954.53,4187.5 C22.2 2299.47,4532.44 3251.95,4532.44 3290.06,4570.55 3290.06,4782.86 3275.41,4797.5 3007.5,4797.5 2924.94,4880.06 2924.94,5119.94 2955,5150 2955,5245.49 2955.06,5245.55 2955.06,5299.45 2916.95,5337.56 2858.45,5337.56 2815.89,5295 2673.05,5295 2567.5,5400.55 2567.5,5592.5 2610.45,5635.45 3830.45,5635.45 4339.64,6144.64 v1(4860.06,6144.64)
  Bottom Layer w25: C22.2 IC3.1 ; v1(4860.06,6144.64) 4860.06,6930.06 P2.3
I3_S: C24.2 IC4.1 P2.5 R55.2 | length 6609.4
  Top Layer w25: v1(1615,5470) 1610.22,5465.22 1585.71,5465.22 1397.44,5276.95 1397.44,4988.05 1443.05,4942.44 1554.94,4942.44 R55.2 1863.75,5248.75 2033.75,5248.75 C24.2 ; v1(4489.54,5860) v1(4925,5860)
  Bottom Layer w25: v1(1615,5470) 1772.89,5627.89 2331.51,5627.89 2788.56,6084.94 4410.77,6084.94 4489.54,6006.17 v1(4489.54,5860) ; C24.2 IC4.1 ; v1(4925,5860) 4925,6895 P2.5
MCU_PWM1: P1.3 R17.2 U2.2 | length 2403
  Top Layer w25: v1(3195,7282.5) 3195,7352.31 3302.69,7460 3415.19,7460 3427.69,7447.5 3562.31,7447.5 3614.81,7500 v1@4141.45,7500 ; v1(4141.45,7486.45) v1@4141.45,7500 ; R17.2@4342.87,6990 4177.22,7155.65 4177.22,7357.78 4155,7380 4155,7486.45 v1@4141.45,7500
  Bottom Layer w25: v1(3195,7282.5) 3196.25,7281.25 3333.52,7281.25 U2.2 ; P1.3 3944.64,7185 3930,7199.64 3930,7466.08 3950.38,7486.45 v1(4141.45,7486.45)
MCU_PWM2: P1.12 R20.2 U2.4 | length 2667
  Top Layer w25: v1(3720.56,6335.56) 3749.94,6364.94 4361.95,6364.94 4555,6557.99 v1(4555,6720)
  Bottom Layer w25: U2.4 3489.36,6925.41 3489.36,6350.28 3504.09,6335.56 v1(3720.56,6335.56) ; P1.12 4195,6785 R20.2 4430,6720 v1(4555,6720)
MCU_PWM3: P1.2 R16.2 U2.6 | length 3473.9
  Top Layer w25: v1(2595,6880) 2595,7017.23 3087.77,7510 3435.9,7510 3448.4,7497.5 3541.6,7497.5 3604.1,7560 4230.36,7560 4245,7545.36 4245,7275 R16.2
  Bottom Layer w25: v1(2595,6880) 2601.76,6880 2611.82,6869.94 3288.75,6869.94 3292.3,6873.48 3328.26,6873.48 U2.6 ; P1.2 4235,7285 R16.2
MCU_PWM4: P1.11 R19.2 U2.10 | length 1163.6
  Bottom Layer w25: U2.10 3637.27,6782.5 3785,6782.5 ; P1.11 4002.5,6782.5 3785,6782.5 ; R19.2 3974.77,6440 3785,6629.77 3785,6782.5
MCU_PWM5: P1.1 R15.2 U2.12 | length 1480
  Bottom Layer w25: U2.12 3880,7225.23 3880,7486.79 3942.16,7548.95 4167.34,7548.95 4225,7491.3 4225,7352.03 ; P1.1 4072.03,7352.03 4225,7352.03 ; 4315,7352.03 4225,7352.03
MCU_PWM6: P1.10 R18.2 U2.14 | length 2100.7
  Bottom Layer w25: U2.14 3777.9,7323.12 3777.9,7551.28 3916.61,7690 4097.01,7690 4410.06,7376.95 4410.06,6885.06 R18.2 4280,6885 P1.10
NetC1_1: C1.1 IC1.2 R5.2 | length 452.5
  Top Layer w25: R5.2 1700,2515 1875,2690 C1.1
  Bottom Layer w25: C1.1 IC1.2
NetC2_1: C2.1 R4.2 R5.1 R6.1 | length 2021.2
  Top Layer w25: R6.1 R5.1 1607.99,2510 1747.93,2370.06 1768.64,2370.06 1809.16,2410.58 1809.16,2475.6 1849.68,2516.12 1954.09,2516.12 2255.21,2215 C2.1
  Bottom Layer w25: C2.1 2322.5,2152.5 2527.5,2152.5 R4.2
NetC15_1: C15.1 D12.1 R25.1 R26.2 VR1.1 | length 2361.9
  Top Layer w25: R25.1 929.09,1528.15 960,1559.06 D12.1
  Bottom Layer w25: R25.1 929.09,1375 805,1250.91 823.19,1250.91 1011.87,1062.22 1300.26,1062.22 1371.59,990.89 1371.59,939.11 1334.98,902.5 996.21,902.5 932.79,839.08 848.72,839.08 754.09,744.45 R26.2 C15.1
NetC17_1: C17.1 IC2.2 R43.2 R46.2 R48.2 | length 3183.3
  Top Layer w25: R43.2 R46.2 3791.56,4763.76 4001.56,4763.76 R48.2
  Bottom Layer w25: R43.2 3504,4696.2 3504,4146.7 4077.22,3573.48 4140.9,3573.48 4261.28,3693.86 4261.28,4007.7 4361.93,4108.35 4372.41,4108.35 C17.1 ; R48.2 4231.03,4766.26 4316.03,4681.26 IC2.2
NetC18_1: C18.1 C19.1 C20.1 C21.1 R35.1 R38.1 R39.1 R42.2 R43.1 R45.2 R46.1 R47.2 R48.1 | length 4626.1
  Top Layer w25: R43.1 R46.1 3791.56,4363.76 4001.56,4363.76 4280.18,4642.38 4339.38,4642.38 4477.03,4504.73 4477.03,4441.56 4692.33,4226.26 R38.1 ; C21.1 C21.1@4602.82,5148.76 ; C20.1@4912.82,5148.76 C20.1 C20.1@4917.82,5148.76 ; R39.1 5010.32,3794.41 5000.32,3804.41 R35.1 R38.1 ; C19.1 C19.1@5225.32,5141.26 ; R42.2 R45.2 R47.2 5440.32,4226.26 R38.1
  Bottom Layer w25: C21.1 4602.82,5148.76 4912.82,5148.76 C20.1 4917.82,5148.76 5217.82,5148.76 C19.1 5225.32,5141.26 5530.32,5141.26 C18.1 5535.32,4916.26 R42.2
NetC22_1: C22.1 IC3.2 R54.2 | length 503.7
  Top Layer w25: R54.2 1907.77,4085.74 1952.77,4085.74 C22.1
  Bottom Layer w25: C22.1 IC3.2
NetC23_1: C23.1 R49.1 R53.2 R54.1 | length 1878.4
  Top Layer w25: R49.1@1314.53,4182.5 R49.1 1319.53,4182.5 1319.53,3902.5 R54.1 1577.03,3645 C23.1 2408.15,3583.88 2635.91,3583.88 R53.2
NetC24_1: C24.1 IC4.2 R60.2 | length 428
  Top Layer w25: R60.2 2005.74,5143.24 2030.74,5143.24 C24.1
  Bottom Layer w25: C24.1 IC4.2
NetC25_1: C25.1 R55.1 R59.2 R60.1 | length 2391.9
  Top Layer w25: R55.1 R55.1@1462.5,5241.85 ; R60.1 1470,5234.35 R55.1@1462.5,5241.85 ; R59.2 2681.38,4703.88 2503.62,4703.88 C25.1 2522.96,4845.46 2532.75,4845.46 2607.03,4919.74 2607.03,5275.26 2567.23,5315.06 2124.59,5315.06 2074.59,5365.06 1814.84,5365.06 1691.63,5241.85 R55.1@1462.5,5241.85
NetD1_1: D1.1 R7.1 | length 247.1
  Top Layer w25: D1.1 3997.5,2907.5 3997.5,2667.5 R7.1
NetD2_1: D2.1 R8.1 | length 230
  Top Layer w25: R8.1 D2.1
NetD3_1: D3.1 R9.1 | length 254.1
  Top Layer w25: R9.1 3725,2668.15 3735,2678.15 D3.1
NetD4_1: D4.1 R10.1 | length 215
  Top Layer w25: R10.1 D4.1
NetD5_1: D5.1 R11.1 | length 212.1
  Top Layer w25: D5.1 4737.5,2902.5 4737.5,2697.5 R11.1
NetD6_1: D6.1 R12.1 | length 207.1
  Top Layer w25: D6.1 4997.5,2912.5 4997.5,2712.5 R12.1
NetD7_1: D7.1 R13.1 | length 202.1
  Top Layer w25: D7.1 5232.5,2917.5 5232.5,2722.5 R13.1
NetD8_1: D8.1 R14.1 | length 354.1
  Top Layer w25: D8.1 5520,2583.15 5530,2573.15 R14.1
NetD9_1: D9.1 R21.1 | length 263.2
  Top Layer w25: R21.1 D9.1
NetD10_1: D10.1 R22.1 | length 315.9
  Top Layer w25: D10.1 5215.91,814.09 R22.1
NetD14_1: D14.1 R40.1 | length 195
  Top Layer w25: D14.1 R40.1
NetIC1_7: IC1.7 R3.2 R4.1 | length 610.2
  Top Layer w25: R4.1 2860,2695 R3.2
  Bottom Layer w25: IC1.7 R4.1
NetIC2_6: IC2.6 R34.1 R36.2 R37.1 R41.2 | length 1326.6
  Top Layer w25: R41.2 R36.2 R37.1 R34.1
  Bottom Layer w25: R34.1 4471.15,4966.26 4712.33,4725.08 4712.33,4712.99 IC2.6
NetIC3_7: IC3.7 R50.2 R53.1 | length 536.9
  Top Layer w25: R53.1 2897.03,4085 R50.2
  Bottom Layer w25: IC3.7 2449.53,4087.5 2734.53,4087.5 R53.1
NetIC4_7: IC4.7 R56.2 R59.1 | length 401.8
  Top Layer w25: R59.1 2728.5,5151 2768.5,5151 R56.2
  Bottom Layer w25: IC4.7 2541.25,5148.75 2726.25,5148.75 R59.1
NetR1_2: R1.2 R2.2 R3.1 R51.2 | length 2353
  Top Layer w25: R1.2 R51.2 ; R3.1 R2.2
  Bottom Layer w25: R51.2 1752.01,2182.99 2113.94,2182.99 2194.43,2102.5 2837.5,2102.5 R3.1
NetR23_1: R23.1 R24.2 U1.6 | length 1818.1
  Top Layer w25: R24.2 4132.5,1482.5 4517.5,1482.5 R23.1
  Bottom Layer w25: R23.1@4507.52,1480 4627.58,1600.06 5094.94,1600.06 5215,1480 5215,1184.13 5155.87,1125 U1.6
NetR50_1: R50.1 R52.2 R57.2 R61.2 | length 2256.2
  Top Layer w25: R61.2 R57.2 2852.03,3520 R50.1 R52.2
NetR56_1: R56.1 R58.2 R62.2 R63.2 | length 719
  Top Layer w25: R63.2 R62.2 3225,5207.5 R56.1 3287.5,5275 3287.5,5450 R58.2
OUT_I_U: J2.3 R1.1 R51.1 | length 2432.7
  Top Layer w25: v1(1080,3990) 1081.97,3988.03 1081.97,3834.2 1147.5,3768.67 1147.5,2464.43 1247.5,2364.43 1247.5,2287.5 R51.1 R1.1
  Bottom Layer w25: J2.3 688.34,3988.47 1078.47,3988.47 v1(1080,3990)
OUT_I_V: J2.4 R57.1 R61.1 | length 1108.2
  Top Layer w25: v1(1194.47,3880.8) 1201.23,3880.8 1228.55,3853.48 1231.77,3853.48 1272.5,3812.75 1272.5,3582.5 1304.24,3550.76 1304.24,3525.76 R57.1 R61.1
  Bottom Layer w25: J2.4 689.36,3880.8 v1(1194.47,3880.8)
OUT_I_W: J2.5 R62.1 R63.1 | length 3179.8
  Top Layer w25: v1(1210,3770) 1210,3776.76 1197.5,3789.26 1197.5,3789.38 1131.97,3854.91 1131.97,3906.69 1164.64,3939.36 1164.64,4124.62 1637.52,4597.5 R63.1 R62.1
  Bottom Layer w25: J2.5@687.04,3769.77 1120.65,3769.77 1120.88,3770 v1(1210,3770)
PWM_IND_b: D3.2 R27.1 S1.1 U2.1 U2.15 | length 7887.8
  Top Layer w25: R27.1 3054.77,7183.07 3267.75,6970.1 3267.75,6593.92 3838.43,6023.24 3875.22,6023.24 v1(3876.02,6022.44)
  Bottom Layer w25: S1.1 3036.62,7375 3046.62,7385 R27.1 3057.27,7382.5 3332.27,7382.5 U2.1 3401.8,7380 3432.5,7410.7 3432.5,7635.89 3469.11,7672.5 3520.89,7672.5 3567.75,7625.64 3567.75,7347.03 U2.15 ; D3.2 3534.94,2809.94 3318.05,2809.94 3151.01,2976.98 3151.01,4343.99 2924.94,4570.06 2924.94,5185.36 2939.59,5200 3775,5200 3775,5921.42 v1(3876.02,6022.44)
PWM_T1: J1.3 R29.2 U2.3 | length 3654.5
  Bottom Layer w25: J1.3 682.99,6919.15 712.22,6889.92 979.54,6889.92 990.4,6879.06 1020.29,6835.49 1026.6,6828.59 1114.47,6740.72 1121.79,6733.4 1248.36,6733.4 1291.26,6768.25 1351.6,6828.59 1353.47,6832.67 1361.56,6850.31 1363.84,7025.37 1363.84,7256.07 1552.83,7445.06 1606.72,7445.06 1759.79,7291.99 1759.79,7210 ; R29.2 1759.79,7210 ; U2.3 3328.26,7186.52 3306.58,7186.52 3303.1,7190 2046.78,7190 2001.72,7144.94 1947.83,7144.94 1909.71,7183.05 1909.71,7185.29 1885,7210 1759.79,7210
PWM_T2: J1.20 R28.2 U2.5 | length 5891.9
  Top Layer w25: v1(375,5290) 683.39,5290 712.5,5319.11 712.5,5432.13 972.5,5692.13 972.5,6873.76 1181.18,7082.44 1442.33,7082.44 R28.2
  Bottom Layer w25: v1(375,5290) 375,5330 289.71,5415.29 289.71,6014.71 419.23,6144.23 419.23,6275.61 565,6421.38 J1.20 ; R28.2 1877.77,6955 1942.83,6889.94 1996.72,6889.94 2056.78,6950 2997.77,6950 3027.82,6919.94 3268.04,6919.94 3328.1,6980 U2.5
PWM_T3: J1.14 R30.2 U2.7 | length 3329.5
  Top Layer w25: v1(1189.1,6895.9) 1574.77,6510.23 R30.2
  Bottom Layer w25: J1.14 572.95,7090.15 572.95,7152.26 628.01,7207.32 725.61,7207.32 832.93,7100 985,7100 1125.38,6959.62 1130.99,6954.01 1136.03,6948.97 v1(1189.1,6895.9) ; R30.2 1875,6460 2195,6780 U2.7
PWM_T4: J1.23 R31.2 U2.9 | length 6120.2
  Top Layer w25: v1(700,4970) v1(700,5180) ; v1(2501.85,6236.85) 2733.88,6468.88 2773.66,6468.88 R31.2
  Bottom Layer w25: J1.23 414.71,5953.6 414.71,5472.72 535.49,5351.93 685.36,5351.93 700,5337.28 v1(700,5180) ; v1(700,4970) 1000.36,4970 1015,4984.64 1015,5610 1075,5670 1526.18,5670 1832.17,5975.99 2054.24,5975.99 2315.11,6236.85 v1(2501.85,6236.85) ; R31.2 3044.77,6200 3770.36,6200 3785,6214.64 3785,6470 3634.77,6620.23 U2.9
PWM_T5: J1.17 R32.2 U2.11 | length 5363.2
  Top Layer w25: v1@1044.86,7664.86 3440.14,7664.86 v1(3495,7610)
  Bottom Layer w25: J1.17 565,6764.72 364.71,6965.02 364.71,7516.69 517.66,7669.65 1039.29,7669.65 v1(1044.07,7664.86) ; v1(3495,7610) 3495,7019.77 U2.11 3567.75,6812.97 3567.75,6552.03 R32.2
PWM_T6: J1.12 R33.2 U2.13 | length 5487.3
  Top Layer w25: R33.2 1759.77,7560 3456.61,7560 3469.11,7547.5 3520.89,7547.5 3591.1,7617.72 4052.72,7617.72 v1(4057.5,7622.5)
  Bottom Layer w25: J1.12 684.76,5932.9 710.46,5932.9 712.22,5931.14 1150.36,5931.14 1165,5945.78 1165,6589.35 1165,6599.71 1173.24,6607.95 1324.79,6731.07 1401.6,6807.88 1411.56,6829.6 1413.84,6834.56 1413.84,7214.07 R33.2 ; U2.13 3634.77,7085.21 3830,7280.44 3830,7507.5 3949.78,7627.28 4052.72,7627.28 v1(4057.5,7622.5)
RESET: J1.2 R44.1 S2.1 S2.2 | length 2468.7
  Top Layer w25: v1(1299.62,7006.42) 1786.42,6519.62 R44.1
  Bottom Layer w25: J1.2 724.67,6980 963.58,6980 1032.95,6910.63 1070.29,6856.2 1076.6,6849.3 1135.18,6790.72 1142.5,6783.4 1230.61,6783.4 1257.73,6805.43 1301.6,6849.3 1301.6,6942.5 v1(1299.62,7006.42) ; S2.2 S2.1 1557.95,6092.95 R44.1
VDC_S: C17.2 D13.1 D15.2 IC2.1 P2.8 R35.2 R38.2 R39.2 | length 7002.3
  Top Layer w25: D13.1 4104.06,4057.17 D15.2 ; v1(4557.5,5980) 5095,5980 v1(5375,6260) ; R35.2@4592.17,4006.26 R35.2 ; R38.2 R35.2 ; R39.2 4610.32,3794.41 4600.32,3804.41 R35.2
  Bottom Layer w25: D15.2 4135.89,4089 4164,4089 4325,4250 4570.62,4250 4594.36,4226.26 R38.2 4774.73,4400.67 5121.73,4400.67 5290.38,4569.31 5290.38,4853.21 5112.27,5031.32 4505,5031.32 ; C17.2 4555.91,4042.52 4592.17,4006.26 R35.2 ; IC2.1 4427.05,4781.26 4242.05,4966.26 4307.11,5031.32 4505,5031.32 ; v1(4557.5,5980) 4552.72,5975.22 4552.72,5957.54 4552.04,5956.87 4552.04,5834.11 4505,5787.07 4505,5031.32 ; P2.8 5214.22,6975 5229.22,6990 5360.36,6990 5375,6975.36 v1(5375,6260)
VDD_15: C3.P C4.1 C5.1 C27.1 C30.1 C32.1 C35.1 IC1.8 IC2.8 IC3.8 IC4.8 J2.14 J2.15 J2.16 P3.1 R2.1 R11.2 R52.1 R58.1 | length 17312.4
  Top Layer w50: C5.1 2570,1215 3022.56,1667.56 3022.56,2797.44 R2.1 2871.38,2948.62 2629.5,2948.62 2586.38,2905.5 2586.38,2901.38 C27.1 ; IC4.8@2538.27,5245.77 IC4.8 ; C32.1 2630,5426.43 2698.93,5357.5 2790,5357.5 R58.1 2962.56,5530.06 3317.13,5530.06 3367.56,5479.63 3367.56,4550 ; C30.1 2658.41,4271.38 2658.41,4275.5 2701.53,4318.62 2878.41,4318.62 R52.1 ; R52.1@2959.39,4240.98 2978.16,4240.98 3177.19,4440 3335,4440 3367.56,4472.56 3367.56,4550 ; C35.1 5115.1,4831.26 5187.66,4903.82 5257.45,4903.82 5302.88,4858.39 5302.88,4379.13 5257.45,4333.7 4673.27,4333.7 4623.59,4383.39 4623.59,4731.02 4623.59,4831.5 4594.3,4860.79 4208.27,4860.79 3897.49,4550 3367.56,4550
  Bottom Layer w50: J2.14 J2.15 J2.16 570.53,3932.6 545.09,3907.17 540.51,3907.17 412.21,3778.86 412.21,2510.42 1034.2,1888.42 P3.1 ; P3.1@1312.05,1883.9 1312.05,1803.62 C3.P 1987.52,1215 C4.1 C5.1 ; IC1.8 2480,2795 C27.1 ; IC3.8 2577.03,4190 C30.1 ; IC4.8 2540,5342.5 C32.1 ; R52.1 3034.59,4162.44 3034.59,3511.55 2957.5,3434.46 2957.5,2888.89 2945,2876.39 R2.1 3083.15,2736.85 3327.83,2736.85 3440.88,2623.8 3440.88,2558.05 3631.37,2367.56 4667.44,2367.56 R11.2 ; IC2.8 4845.79,4782.99 4948.24,4782.99 4996.51,4831.26 C35.1
VEE_-15: C9.P C10.1 C11.1 C26.1 C29.1 C31.1 C34.1 IC1.4 IC2.4 IC3.4 IC4.4 J2.23 J2.24 J2.25 P3.3 R12.2 | length 15108.1
  Top Layer w50: P3.3 1507.52,2147.48 1310,2345 1310,2390.31 1215,2485.31 1215,2819.69 1473.88,3078.56 2193.56,3078.56 v1(2445,3330) 2572.5,3457.5 2899.21,3457.5 ; 2897.67,3459.04 2899.21,3457.5 ; v1(3585,2520) 3325.31,2520 3267.44,2577.87 3267.44,2907.13 3320,2959.69 3320,3036.71 2899.21,3457.5 ; C34.1 4116.5,4283.7 3536.93,4283.7 3536.93,4095.22 2899.21,3457.5
  Bottom Layer w50: J2.23 J2.24 J2.25 578.16,2951.13 578.16,2881.89 1023.77,2436.29 1208.4,2436.29 1507.52,2137.17 P3.3 1702.52,1693.42 C9.P 2250.67,1693.42 C10.1 C11.1 ; IC1.4 1930,2355 C26.1 1868.93,2355 1800,2423.93 1800,3015.95 1952.03,3167.98 C29.1 ; IC3.4 2147.03,3760 ; IC4.4 2240,4840 2230,4850 C31.1 2037.5,4430.98 1877.03,4270.51 1877.03,3828.93 1945.96,3760 C29.1 ; v1@2435,3340 2147.03,3627.97 2147.03,3760 ; v1(3585,2520) 4790,2520 R12.2 ; C34.1 IC2.4 ; C29.1 2147.03,3760
VIN_12: C6.P C7.1 C8.1 C12.1 C14.1 D11.2 J1.6 J1.15 J1.21 J1.24 P4.1 Q1.1 R10.2 VR1.3 | length 17292
  Top Layer w50: v1(764.64,5572.67) 910,5718.02 v1(910,6615) 835,6690 835,7020 985,7170 985,7297.5 v1(982.5,7300) ; v1(3500,610) 3510,610 3735,835 3735,1280 4460,2005 R10.2